# Altium PCB testboard.PcbDoc
Units mil, origin at the board's own origin, x right, y up, seen from the top; angles counter-clockwise.
Board outline 2795 x 2470 mil, 2 copper layers (Top Layer, Bottom Layer); 4 components, 0 nets, 13 pads, 0 vias.
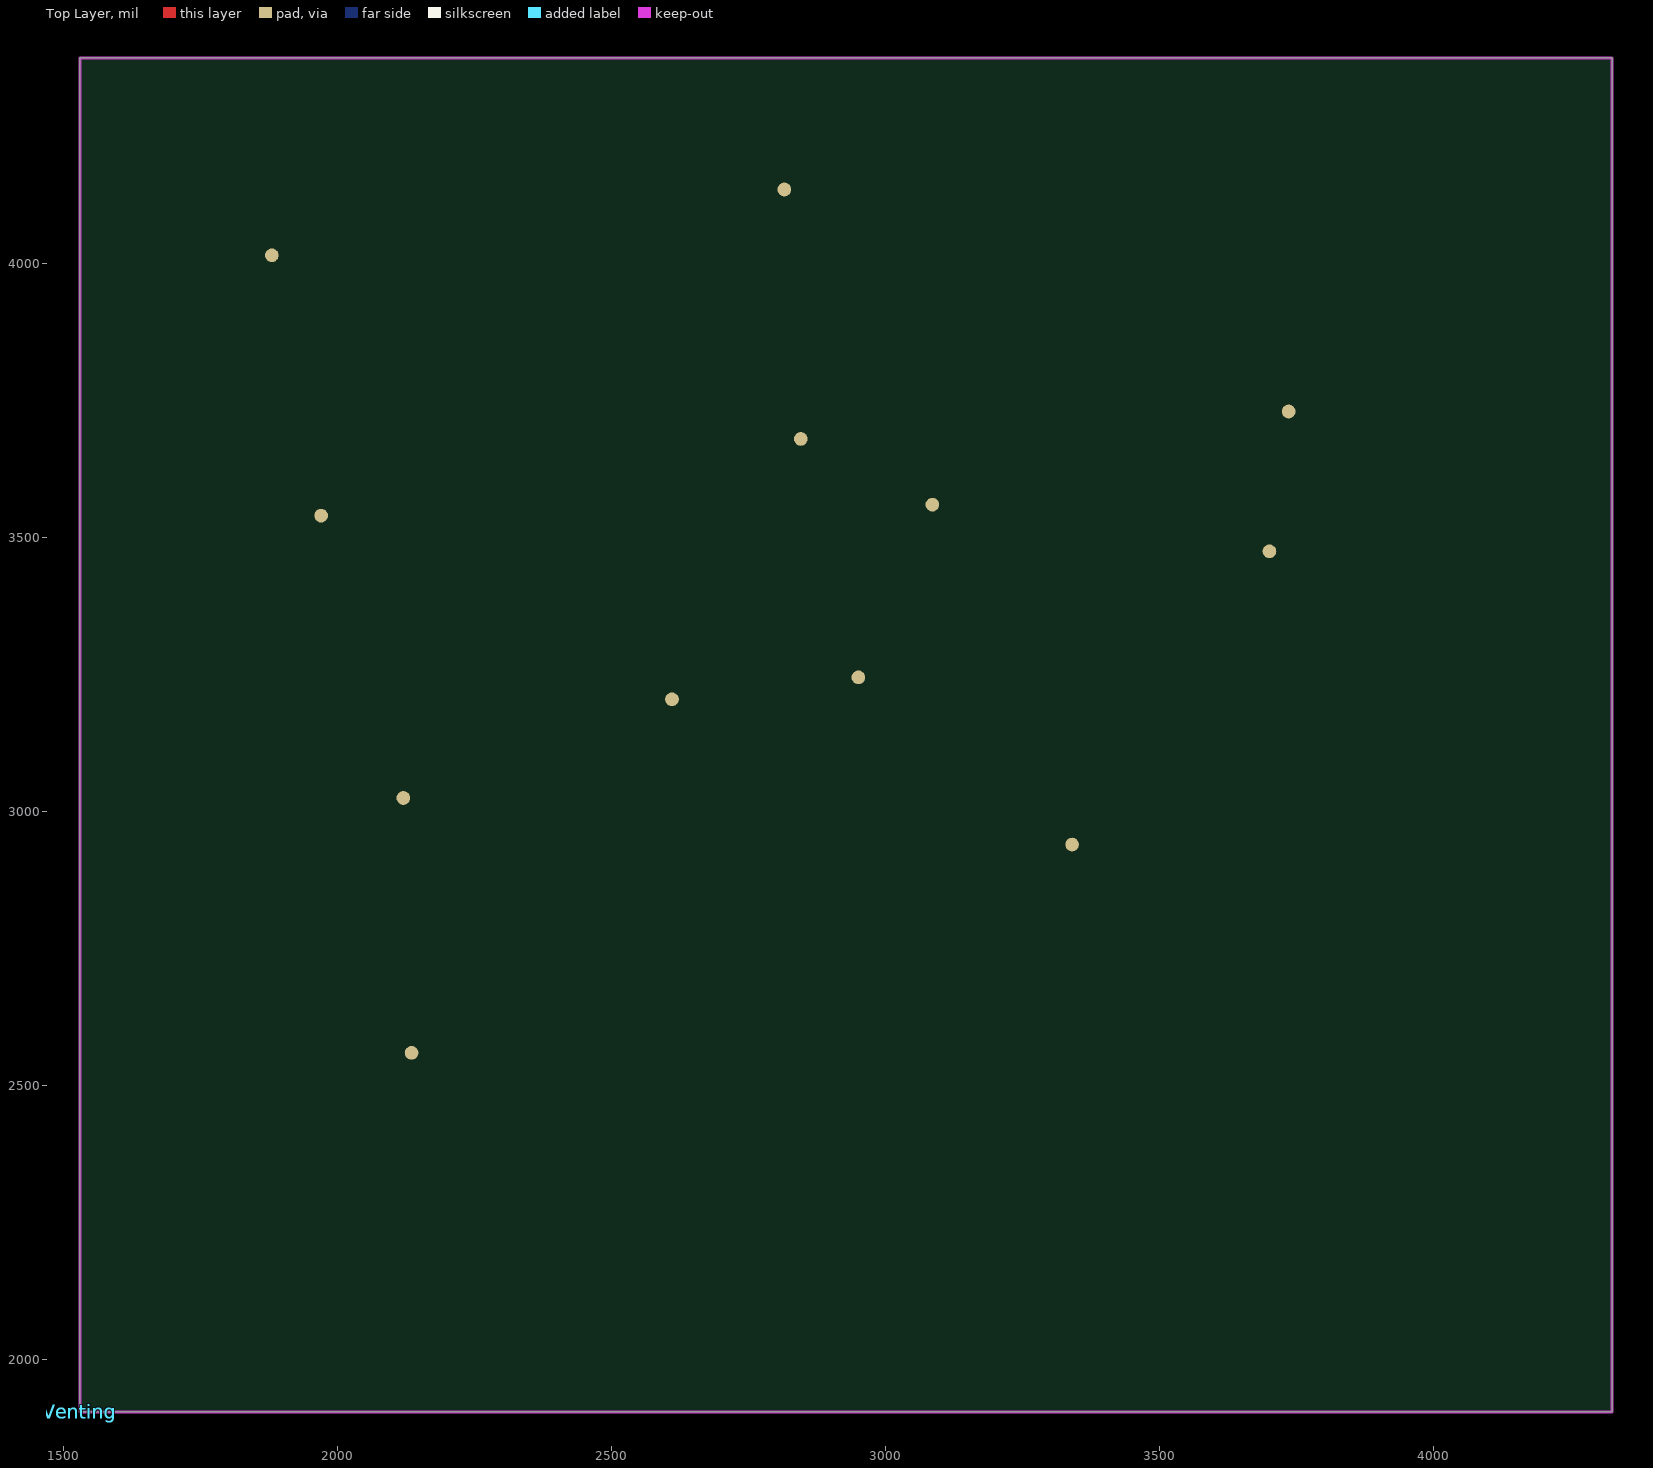
[diagram p0: Top Layer view]
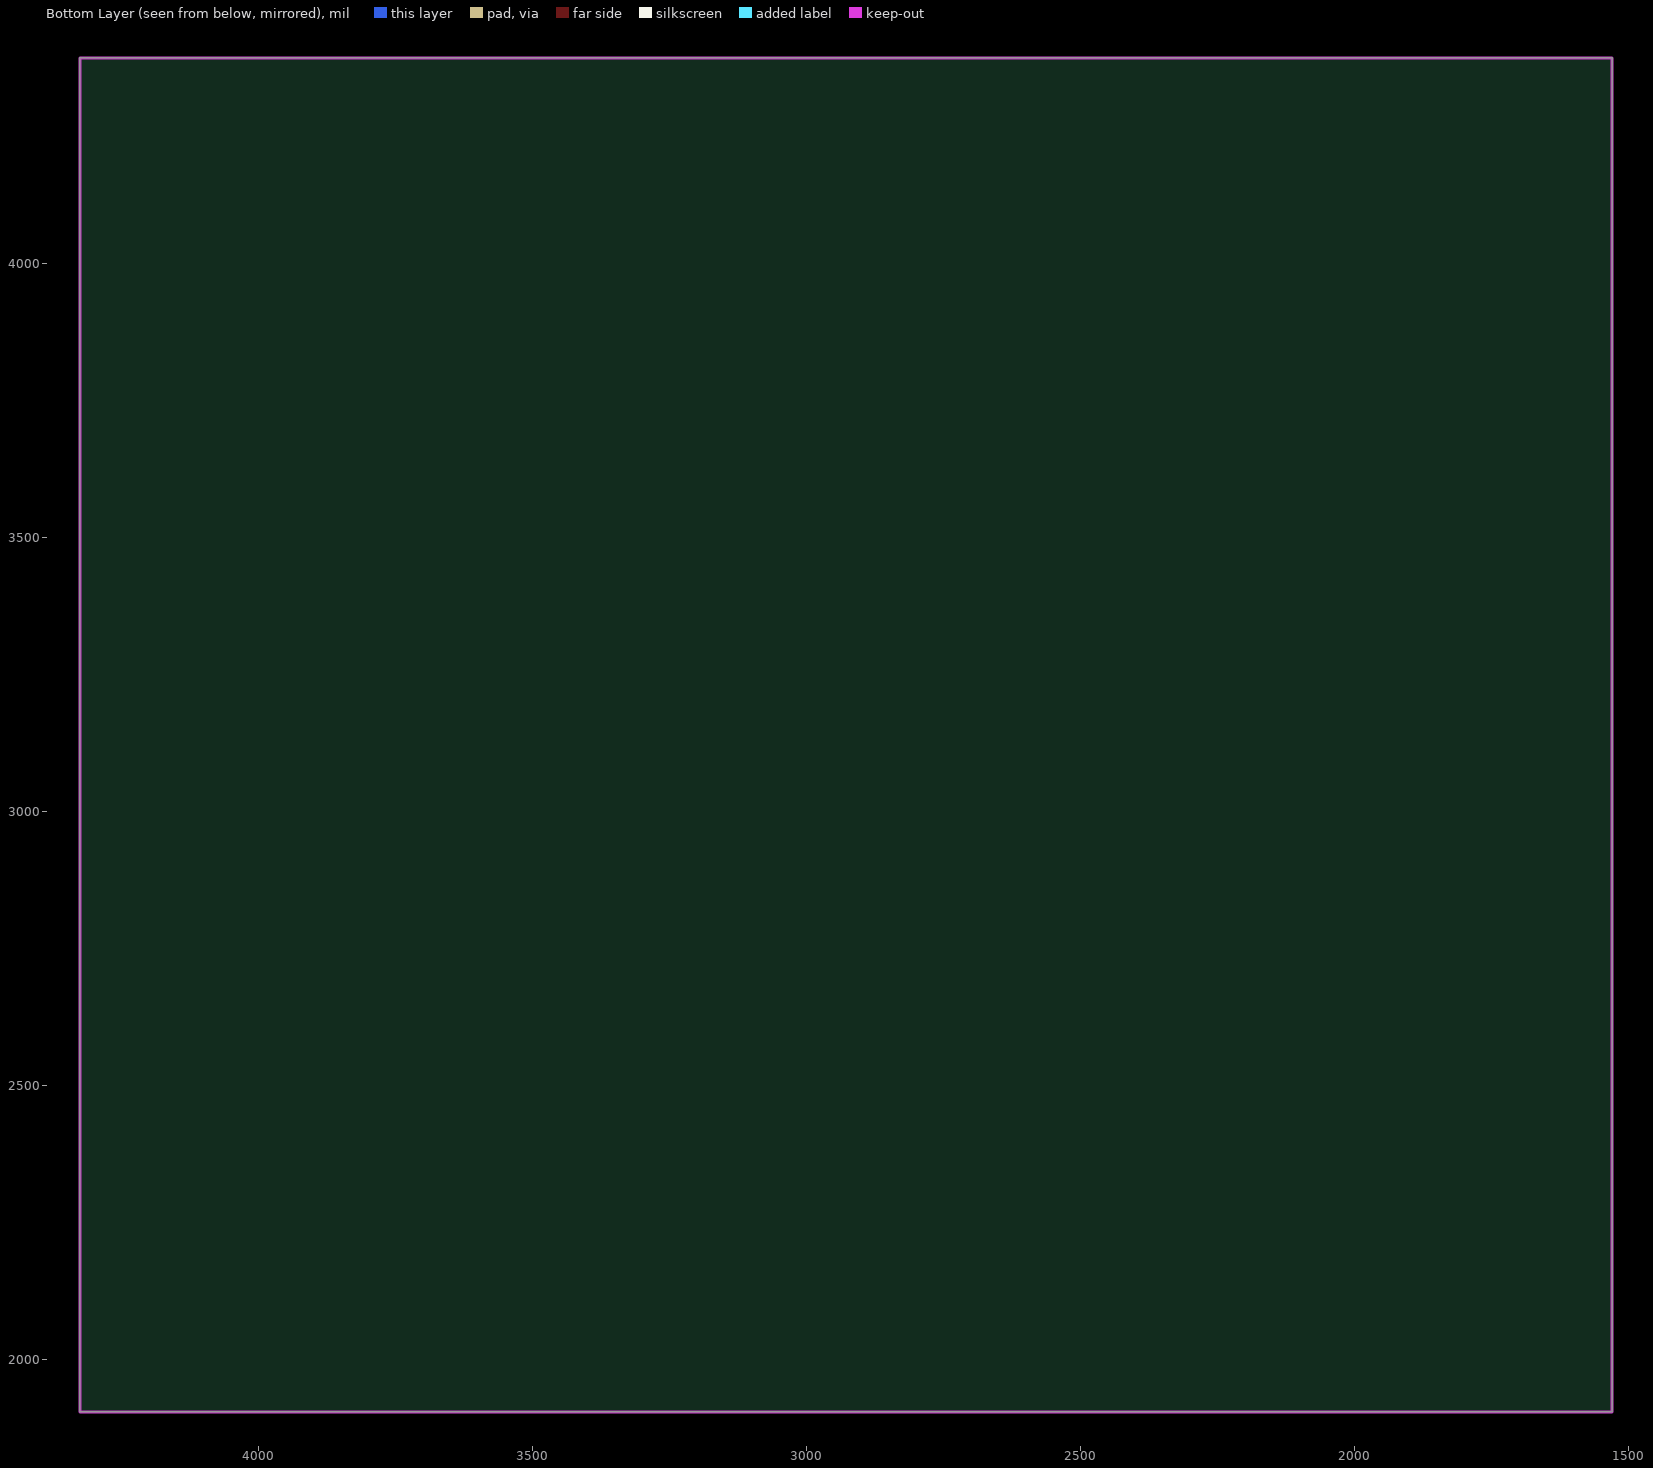
[diagram p1: Bottom Layer view, seen from below]

## Layer stack, top to bottom
Top Solder: solder mask 0.4, Solder Resist, Dk 3.5
Top Layer: signal copper 1.4
Dielectric 1: dielectric 12.6, FR-4, Dk 4.8
Bottom Layer: signal copper 1.4
Bottom Solder: solder mask 0.4, Solder Resist, Dk 3.5

## Board outline
1530,1905 4325,1905 4325,4375 1530,4375

## Design rules (kind name [scope] priority, off if disabled: settings)
Clearance Venting-Internal [InComponent('Venting') vs InComponent('Venting')] p1: gap=31.5 // Clearance between Venting Pads
Clearance Venting-Electrical [InComponent('Venting') vs OnSignal] p2: gap=19.68 // Clearance between Venting Pads and Electrical Objects
Clearance Venting-Board [InComponent('Venting') vs OnLayer('Keep-Out Layer')] p3: gap=19.68 // Clearance between Venting Pads and Board Outline
Clearance [All] p4: gap=10
ComponentClearance Venting-Comp [InComponent('Venting')] p1: gap=0 collisioncheckmode=3 verticalgap=0 showdistances=FALSE // Clearance between "Venting" Component and other Components
ComponentClearance [All] p2: gap=10 collisioncheckmode=3 verticalgap=10 showdistances=FALSE
PolygonConnect [All] p1: connectstyle=Relief reliefconductorwidth=10 reliefentries=4 polygonreliefangle="90 Angle" airgapwidth=10
RoutingVias [All] p1: holewidth=28 width=50 viastyle="Through Hole" minholewidth=28 minwidth=50 maxholewidth=28 maxwidth=50
SolderMaskExpansion [All] p1: expansion=4
UnpouredPolygon [All] p1: allowunpoured=FALSE
Width Venting-Width [InComponent('Venting')] p1: maxlimit=10 minlimit=10 preferedwidth=10 // Width Constraint for Arcs in "Venting" Component
Width [All] p2: maxlimit=10 minlimit=10 preferedwidth=10
28 further rules are at their usual default settings.

## Components (designator, comment, footprint, x,y, rotation, side; value= is the part's Value field where it differs from the comment)
Venting "Component That Holds Thieving Pads" ? 1530,1905 r0 top locked
Venting "Component That Holds Thieving Pads" ? 1530,1905 r0 top locked
Venting "Component That Holds Thieving Pads" ? 1530,1905 r0 top locked
Venting "Component That Holds Thieving Pads" ? 1530,1905 r0 top locked

## Footprints (in the part's own frame and the unit in brackets; to place one, negate y for a bottom-side part, rotate by r counter-clockwise, add the part's x,y. Pads: shape width x height; smd on the part's side, far side on the other; paste and mask are expansions set on the pad)
? [mil]

## Free pads (board coordinates)
  round 25 smd: 0(2845,3680) 1(3085,3560) 2(2950,3245) 3(2610,3205) 4(3340,2940) 5(3700,3475) 6(3735,3730) 7(2815,4135) 8(1880,4015) 9(1970,3540) 10(2120,3025) 11(2135,2560)
  round 25 on Keep-Out: 12(2615,2380)

## Nets (pads, with @x,y where several pads share a name; then routed paths per layer and width w, separated by ;. In a path a pad name is that pad's centre, name@x,y a point inside that pad or via, vN(x,y) a via of type N, cw(c..) or ccw(c..) an arc to the next point about the centre after c; other vN are vias at no path point)

## Keep-outs
Keep-Out Layer:
  the board outline again, w6